# Altium PCB FPGA_Board.PcbDoc (part 7 of 10)
Units mm, origin at the board's own origin, x right, y up, seen from the top; angles counter-clockwise.
Board outline 103.63 x 86.08 mm, 2 copper layers (Top Layer, Bottom Layer); 109 components, 200 nets, 667 pads, 237 vias.
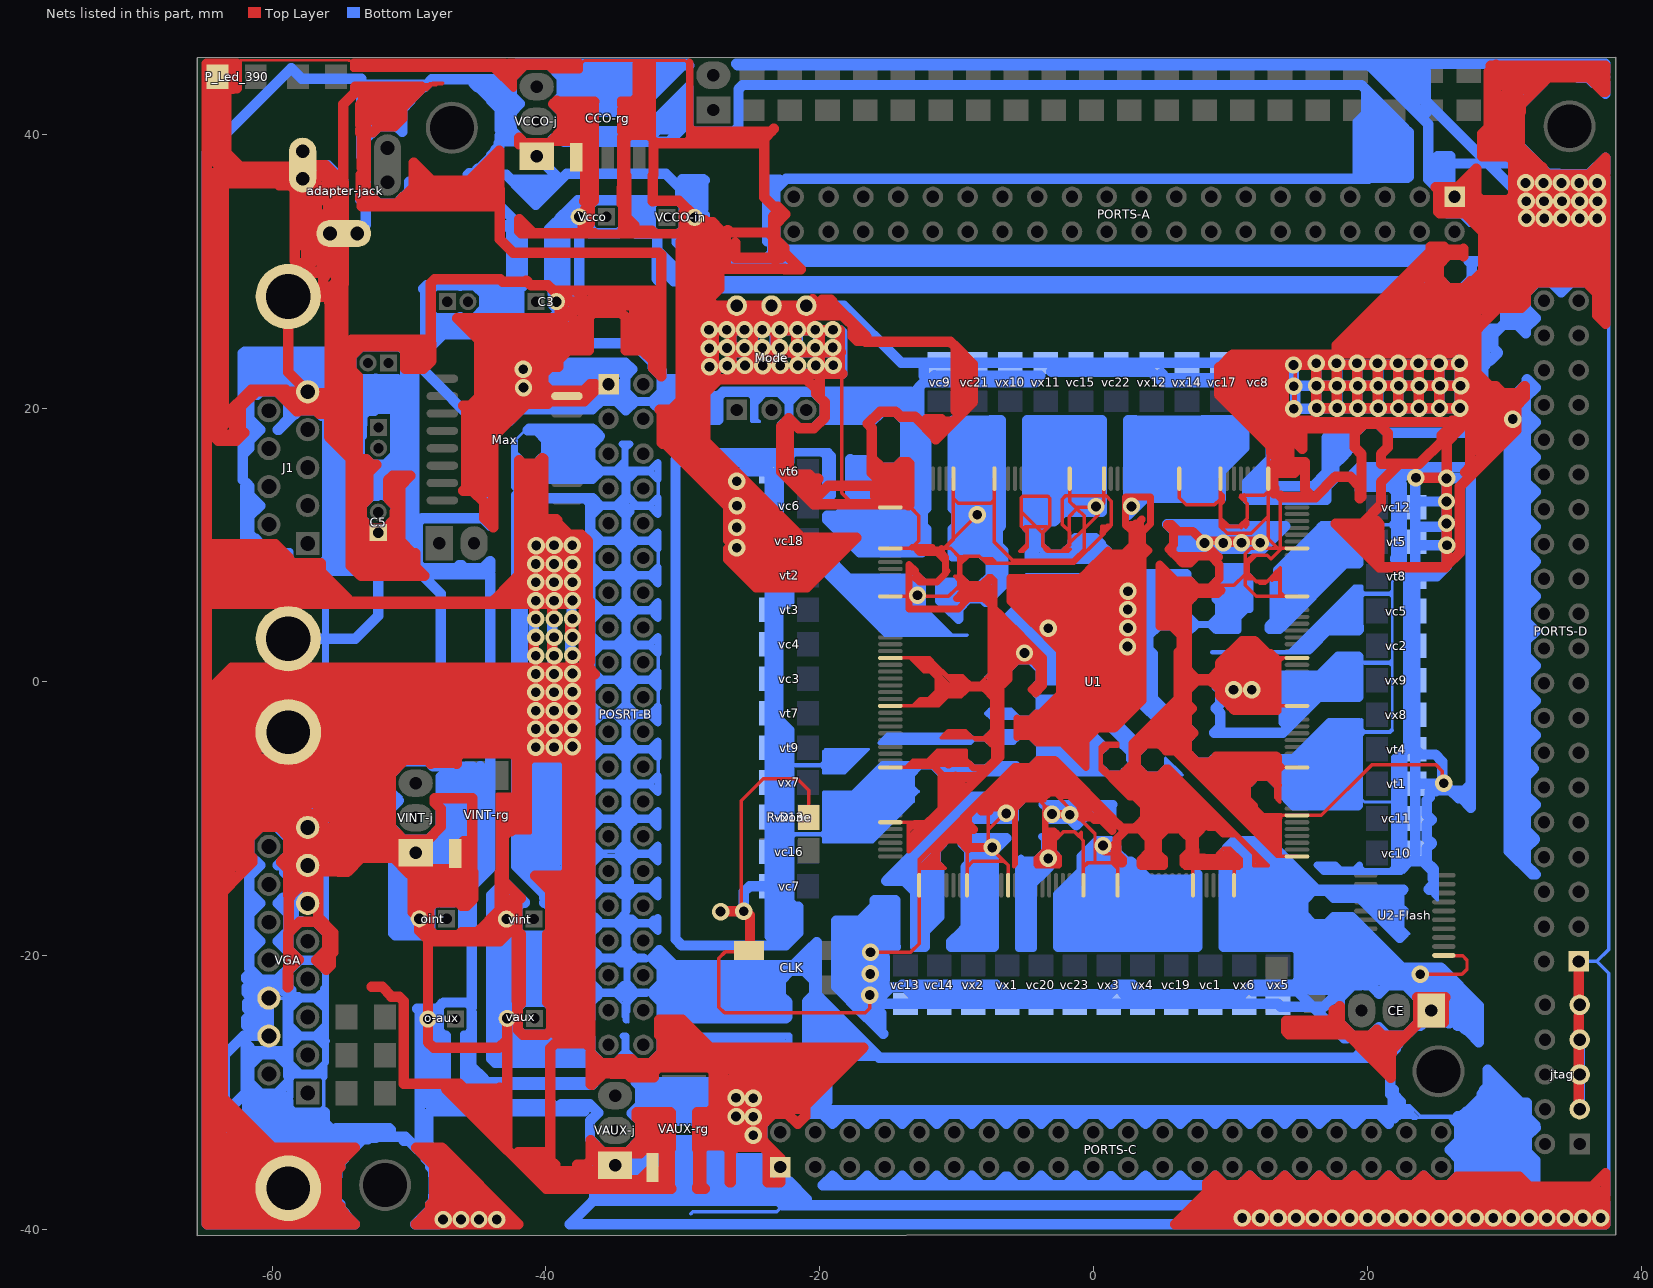
[diagram p7: the nets of this part, all layers, seen from the top]

## Via types
v1: diameter 1.27, hole 0.711, Top Layer to Bottom Layer, 237 vias

## Nets (pads, with @x,y where several pads share a name; then routed paths per layer and width w, separated by ;. In a path a pad name is that pad's centre, name@x,y a point inside that pad or via, vN(x,y) a via of type N, cw(c..) or ccw(c..) an arc to the next point about the centre after c; other vN are vias at no path point) (continued)
GND: (continued)
  Bottom Layer w0.762: -61.532,13.534 -60.878,12.88 -61.671,12.087 ; -59.486,9.399 -59.773,9.399 -60.23,9.399 -60.48,9.649 -60.871,10.04 -61.159,10.328 -61.659,10.828 ; -59.183,-15.747 -59.606,-16.17 -58.839,-16.937 -58.813,-16.963 -58.813,-18.147 -58.839,-18.173 -58.869,-18.203 -58.869,-18.742 ; -58.925,-29.34 -59.634,-30.048 ; -58.831,-26.95 -58.863,-26.982 ; -58.831,-21.53 -58.831,-22.302 -58.606,-22.527 -58.606,-22.608 -58.839,-22.841 -58.863,-22.865 -58.863,-22.913 -58.863,-26.982 ; -58.831,-18.742 -58.839,-18.742 -58.869,-18.742 ; VGA.16@-58.822,-36.985 -58.932,-36.875 -62.125,-36.875 -63.459,-35.541 -63.459,-31.536 ; VGA.17@-58.822,-3.665 -58.822,-6.265 ; J1.10@-58.822,3.155 -56.1,3.155 -53.914,3.155 -52.25,4.819 -52.25,8.115 ; -58.813,-28.756 -58.813,-28.408 -58.813,-28.043 -58.831,-28.025 -59.65,-27.206 -60.834,-27.206 -61.671,-28.043 ; adapter-jack.2@-57.775,37.75 -55.941,37.75 -54.791,36.6 -54.791,32.766 adapter-jack.3@-54.775,32.75 ; VGA.6@-57.402,-16.17 VGA.7@-57.402,-13.4 VGA.8@-57.402,-10.63 -57.402,-9.316 -57.442,-9.276 ; -56.389,19.429 -56.81,19.849 -57.994,19.849 -58.297,19.546 -58.395,19.546 -59.521,18.42 -59.606,18.42 -58.813,19.213 -58.813,20.397 ; -56.135,8.86 -55.973,9.023 -55.973,9.175 -55.895,9.253 ; adapter-jack.3B@-53.775,32.75 -53.152,33.373 -53.152,34.845 ; -52.533,19.784 -53.092,19.784 -53.434,19.442 -53.434,18.827 -53.464,18.797 -53.464,17.994 -53.615,17.843 -53.615,16.219 ; -52.338,13.609 -52.751,13.609 -53.459,12.901 -53.459,11.899 -53.45,11.89 ; -51.216,13.076 -51.537,13.397 -51.537,13.611 -51.644,13.504 -51.794,13.654 -53.161,13.654 -53.161,14.227 -53.063,14.325 -51.483,14.325 -51.483,14.812 -51.624,14.953 -53.063,14.953 -53.063,15.506 -52.967,15.602 -51.001,15.602 ; -50.383,-33.501 -50,-33.501 ; -49.991,36.543 -49.918,36.47 ; -48.456,-35.427 -48.186,-35.698 ; v1(-47.514,-39.267) -47.861,-39.614 -48.424,-39.614 ; v1(-46.204,-39.267) v1(-44.893,-39.267) ; -44.494,25.949 -44.494,26.242 ; -44.493,25.948 -44.41,26.031 -42.48,26.031 -42.48,27.69 -42.657,27.867 -43.869,27.867 -43.987,27.749 -43.987,26.749 ; -43.906,24.547 -43.906,24.673 -43.172,25.407 ; -43.392,40.327 -43.392,43.124 ; -42.134,45.139 -41.08,45.139 ; v1@-41.608,21.768 -41.59,21.75 v1@-41.176,21.75 ; v1@-41.591,23.083 -41.176,22.668 -41.176,22.353 v1@-41.176,21.75 ; v1@-41.175,22.917 -40.758,22.5 -34.884,22.5 -34.517,22.867 -34.766,23.116 -40.476,23.116 -41.075,23.715 -42.057,22.733 -42.057,20.17 -41.176,21.051 ; v1@-40.916,-4.929 -40.916,-3.543 v1@-40.8,-3.427 ; v1@-40.898,4.508 -40.898,3.211 v1@-40.889,3.202 ; v1@-40.862,7.164 -40.862,5.859 v1@-40.844,5.841 ; v1@-40.859,8.609 v1(-40.745,8.609) ; v1@-40.853,1.833 -40.853,0.51 v1@-40.835,0.492 ; v1@-40.827,-4.777 -40.774,-4.724 v1@-39.417,-4.724 ; v1@-40.792,-0.822 -40.751,-0.781 v1@-39.459,-0.781 ; v1@-40.745,-2.134 -40.715,-2.104 v1(-39.407,-2.103) ; VCCO-j.1@-40.678,38.4 -39.044,36.766 -38.831,36.766 ; -40.132,-16.116 -40.021,-16.116 -39.679,-16.458 -39.679,-18.192 -39.806,-18.319 -39.829,-18.342 -39.806,-18.365 -39.573,-18.598 ; v1@-39.544,3.221 v1@-39.544,4.552 ; v1@-39.528,1.874 -39.501,1.847 v1@-39.501,0.54 ; C3.2@-39.526,27.575 -38.988,27.037 -38.988,25.849 -38.912,25.925 -38.912,26.501 -38.758,26.655 -38.758,27.172 -38.528,26.942 -38.528,25.466 -38.72,25.274 -38.969,25.523 -39.161,25.523 -39.621,25.983 -39.372,26.232 -39.372,26.75 -39.556,26.566 -40.274,26.566 -40.274,25.925 -39.085,24.736 -33.604,24.736 -33.066,24.198 ; C3.2@-39.526,27.907 -38.748,28.685 -38.748,33.324 -38.965,33.542 -39.021,33.542 ; v1@-39.512,7.167 -39.496,7.151 v1@-39.496,5.836 ; v1@-39.512,8.609 v1(-40.745,8.609) ; v1@-39.456,-4.781 -39.417,-4.742 v1@-39.417,-4.724 ; v1@-39.417,-3.433 v1@-39.417,-4.724 ; v1(-39.408,9.976) v1(-38.085,9.976) ; C3.2@-39.235,27.775 C3.2@-39.197,27.775 ; v1@-38.223,3.195 -38.223,1.902 v1@-38.199,1.878 ; v1@-38.215,4.537 -38.134,4.618 v1@-38.134,5.846 ; v1@-38.199,8.603 -38.199,7.212 v1@-38.15,7.163 ; v1@-38.174,0.544 -38.174,-0.757 v1@-38.158,-0.773 ; v1@-38.109,-2.082 -38.109,-3.381 v1@-38.081,-3.409 ; v1(-38.063,-4.724) v1@-39.417,-4.724 ; Vcco.2@-37.575,33.975 -37.575,28.289 -38.089,27.775 C3.2@-39.197,27.775 ; -37.465,18.003 -37.534,18.072 ; -36.498,15.852 -36.883,15.467 -39.053,15.467 -39.175,15.589 -39.588,15.589 -39.87,15.871 -39.87,15.918 -37.427,15.918 -37.127,16.218 -36.763,16.218 ; -36.45,-12.135 -36.763,-11.823 -36.763,-10.717 -36.349,-10.303 -36.349,-9.908 -36.349,-9.697 -36.763,-9.283 -36.763,-8.177 -36.046,-7.46 -36.763,-6.743 -36.763,-5.637 -36.658,-5.532 -36.046,-4.92 -36.059,-4.907 -36.636,-4.33 -36.763,-4.203 -36.763,-3.097 -36.046,-2.38 -36.763,-1.663 -36.763,-0.557 -36.046,0.16 ; -36.095,15.449 -36.497,15.852 -36.763,16.117 -36.763,16.218 ; -36.046,-15.08 -36.047,-15.078 -36.763,-14.363 -36.763,-13.257 -36.048,-12.543 -36.048,-12.537 ; -36.046,-12.54 -36.048,-12.537 ; -36.046,15.4 -36.61,14.836 -39.701,14.836 -40.484,15.619 -40.484,16.137 -39.976,16.645 -39.976,17.655 -40.69,18.369 ; -35.942,35.184 -36.442,35.184 ; VAUX-j.1@-34.95,-35.3 -36.469,-33.781 -36.469,-37.804 -36.571,-37.906 -36.551,-37.906 ; VAUX-j.1@-33.794,-35.413 -25.095,-35.413 -25.08,-35.398 ; -33.714,-17.528 -33.714,-17.411 ; -32.859,-36.506 -32.745,-36.392 -24.686,-36.392 ; -32.272,20.48 -32.206,20.547 -32.09,20.662 -31.664,21.088 ; -30.8,44.671 -31.576,43.895 -32.02,43.895 ; -29.223,25.697 -29.192,25.666 -29.192,24.065 ; v1@-28.041,23.029 -28.706,23.029 -29.255,22.48 -27.813,22.48 -27.203,23.09 v1@-26.784,23.09 ; v1@-27.924,25.697 -27.924,24.159 -27.877,24.112 -27.595,24.394 v1@-26.811,24.394 ; -26.507,-29.638 -26.507,-29.864 -26.979,-30.336 ; v1@-26.35,-29.874 -26.354,-29.878 v1@-26.354,-32.005 ; v1@-26.167,-30.38 -26.135,-30.412 v1@-25.395,-30.412 ; v1@-26.166,-30.443 -26.113,-30.496 v1(-26.113,-31.743) ; v1(-26.075,14.65) -26.075,14.925 -25.625,15.375 vt6.1@-23.65,15.375 vc6.2@-23.65,12.85 ; Mode.6@-26.065,27.485 -26.065,26.085 v1@-26.475,25.675 ; v1(-25.546,-16.749) -25.546,-15.334 -25.132,-14.92 vc7.2@-23.65,-14.92 ; v1@-25.501,24.394 -26.168,24.394 v1@-26.475,24.088 ; v1@-24.95,-33.082 v1@-24.858,-32.99 ; v1(-24.858,-33.109) v1@-24.858,-32.013 ; v1@-24.858,-31.852 v1@-24.858,-32.013 ; v1@-24.816,-31.82 v1@-24.858,-31.82 ; v1@-24.197,23.097 -24.258,23.097 -24.855,22.5 ; Mode.5@-23.525,27.485 -23.525,25.905 v1@-23.295,25.675 ; -23.42,-22.548 -23.28,-22.408 ; PORTS-C.1@-23.371,-35.548 -23.842,-35.548 -24.386,-36.092 ; -23.214,-16.939 -23.036,-16.761 vt7.1@-23.036,-2.72 ; v1@-22.893,23.09 -22.893,22.842 -23.235,22.5 ; -22.405,-19.159 -21.561,-18.315 -21.561,-16.404 -21.892,-16.404 ; -22.295,-18.413 -21.892,-18.01 -21.892,-16.404 ; -22.234,16.517 -22.234,16.086 -22.743,16.086 -22.818,16.161 -30.123,16.161 -30.202,16.082 -22.913,16.082 -22.643,15.812 -23.011,15.445 -23.011,8.03 -22.345,7.364 -22.234,7.364 -22.234,5.861 -22.37,5.861 -22.775,5.455 ; -22.062,16.689 -30.08,16.689 -30.539,16.23 -30.539,-18.784 -30.071,-19.252 -22.498,-19.252 -22.498,-16.435 ; v1@-21.603,23.097 -21.603,22.512 v1@-21.615,22.5 ; -20.937,-23.349 -20.418,-22.83 -20.418,-21.82 -20.777,-21.461 ; v1@-20.286,23.123 -20.286,22.791 -20.115,22.62 v1@-20.115,24.088 ; v1(-19.052,24.422) -19.052,24.291 -18.946,24.185 -18.548,24.185 -18.45,24.088 v1@-20.115,24.088 ; -18.789,-25.499 -19.349,-24.939 -19.456,-24.939 ; -17.314,-8.463 -17.522,-8.671 -19.041,-8.671 -19.041,-10.989 -19.29,-11.238 -19.098,-11.43 -17.759,-11.43 -16.432,-11.43 -16.432,-11.259 -16.872,-10.819 -16.93,-10.877 -17.206,-10.877 -18.516,-10.877 -18.516,-9.281 -18.521,-9.276 -17.583,-9.276 -17.492,-9.185 -17.492,-9.471 -17.938,-9.917 -17.938,-10.219 -17.874,-10.283 -17.243,-10.283 -17.243,-9.223 -17.11,-9.09 -17.11,-9.934 -16.687,-10.357 -16.554,-10.49 -16.145,-10.899 -16.145,-10.988 -13.444,-8.287 -13.444,-8.267 -13.441,-8.264 -13.441,-7.976 -13.557,-7.86 -13.945,-7.86 -16.119,-10.034 -16.241,-9.912 -16.485,-9.668 -16.485,-8.952 -16.787,-8.65 -16.787,-8.395 -16.029,-9.153 -16.029,-9.223 -14.225,-7.419 -13.748,-7.419 -13.584,-7.419 -13.456,-7.291 -13.456,-7.127 -13.456,-6.921 -14.448,-6.921 -15.8,-8.273 -16.092,-8.273 -16.341,-8.024 -15.906,-7.589 -15.848,-7.589 -15.058,-6.799 -15.058,-6.666 -14.793,-6.401 -13.366,-6.401 ; v1(-16.3,-19.75) -16.325,-19.775 v1(-16.325,-21.325) v1@-16.325,-21.955 ; v1@-15.753,-20.053 -15.293,-20.053 -15.255,-20.091 -15.255,-22.315 ; -15.657,-19.881 v1@-15.791,-20.015 ; -15.504,-22.929 -15.791,-22.642 -15.791,-22.489 ; -15.373,-25.697 -15.523,-25.546 ; -12.482,-15.293 -13.467,-14.308 -13.582,-14.308 ; -12.481,-15.293 -12.481,-17.052 ; -10.653,6.338 -10.653,6.594 -10.691,6.632 -10.672,6.651 -10.102,6.651 -10.073,6.68 -9.722,6.68 -9.579,6.537 ; -10.063,-19.336 -10.385,-19.336 -10.385,-18.975 -10.316,-18.906 ; -9.937,-19.336 -9.886,-19.336 ; v1(-8.494,12.208) -8.494,9.693 -8.245,9.444 ; v1(-7.414,-12.088) v1@-7.414,-12.449 ; v1(-6.387,-9.607) -9.763,-9.607 -10.145,-9.989 ; v1@-6.162,-9.143 -6.331,-8.974 -9.586,-8.974 ; -6.16,1.908 -6.117,1.908 -5.587,2.438 -5.587,2.541 ; -3.397,-1.793 -3.317,-1.873 -0.541,-1.873 -0.157,-1.873 -0.157,-2.257 -0.157,-2.286 -0.029,-2.414 -4.138,-2.414 -4.151,-2.401 -3.856,-2.105 -3.856,-1.793 -3.856,-1.331 -3.821,-1.296 -1.118,-1.296 -0.086,-1.296 0.851,-2.233 0.596,-2.233 0.501,-2.138 0.501,-2.52 1.053,-3.072 ; -3.382,0.234 -3.881,0.733 ; v1(-3.32,3.911) v1@-3.539,3.911 ; vx11.1@-3.099,22.661 4.22,22.661 4.997,21.884 12.984,21.884 13.135,22.035 13.135,22.19 ; -1.869,18.149 -1.869,17.901 ; v1(0.174,12.808) -1.807,12.808 -1.88,12.735 ; v1(0.68,-11.954) v1@0.68,-12.071 ; v1@1.226,-11.641 0.274,-11.641 -0.131,-12.046 ; 1.456,-11.87 1.456,-11.969 1.354,-12.071 ; 1.986,-4.005 1.053,-3.072 ; v1@2.256,4.715 v1@2.473,4.932 ; v1(2.489,5.289) 2.51,5.31 v1(2.51,6.629) ; v1(2.504,3.934) 2.504,2.611 v1(2.473,2.58) ; 2.993,-5.023 2.378,-4.408 2.378,-4.328 2.898,-4.328 1.084,-2.514 1.053,-2.514 1.053,-3.072 ; vx12.1@4.975,22.535 5.32,22.19 13.135,22.19 ; v1@7.858,9.736 7.334,9.736 ; 8.451,14.822 8.732,14.822 9.285,15.375 ; 8.908,-39.224 8.939,-39.193 10.209,-39.193 ; 9.051,-5.64 8.784,-5.64 8.53,-5.894 7.52,-5.894 ; 9.285,13.44 9.285,13.988 9.285,15.375 ; 9.422,-5.64 8.555,-6.507 8.386,-6.507 8.706,-6.827 ; v1(10.801,10.17) 7.768,10.17 7.334,9.736 ; 11.529,-39.193 12.83,-39.193 ; v1(11.55,-0.581) 11.31,-0.341 9.212,-0.341 ; 11.912,9.519 11.949,9.519 12.129,9.519 13.001,10.391 ; 12.021,-12.302 13.803,-14.084 13.803,-14.445 ; 13.135,22.394 13.135,22.19 ; 14.113,-39.15 14.119,-39.156 v1@15.408,-39.156 ; 14.23,-5.64 14.625,-5.64 ; 14.878,8.896 14.136,8.154 13.529,8.154 ; 15.497,-19.496 15.497,-18.939 15.867,-18.569 17.621,-18.569 17.87,-18.32 18.548,-18.32 21.122,-20.894 21.451,-20.565 21.451,-20.491 21.297,-20.491 18.542,-17.736 17.715,-17.736 17.319,-18.132 15.243,-18.132 ; v1(16.25,23.275) v1@16.25,23.15 ; v1@16.685,-39.236 16.808,-39.359 v1@17.955,-39.359 ; 16.932,-7.07 15.502,-5.64 14.625,-5.64 ; v1(17.746,23.275) 17.793,23.229 v1@17.793,23.15 ; 18.134,4.309 17.59,3.765 ; 18.503,16.759 18.182,16.438 ; 19.062,6.126 19.062,5.719 18.8,5.457 ; v1@19.146,-39.022 19.154,-39.03 v1@20.548,-39.03 ; v1(19.243,23.275) v1@19.243,23.15 ; 19.379,-3.605 19.316,-3.542 19.316,-3.015 17.25,-3.015 16.66,-3.605 14.625,-5.64 ; 19.429,-3.656 19.436,-3.663 19.291,-3.808 19.291,-8.278 19.291,-9.01 14.625,-9.01 13.545,-7.93 13.545,-7.57 12.831,-6.856 ; 19.826,-22.166 20.226,-22.166 20.668,-22.607 ; 20.482,-26.517 20.822,-26.857 ; v1(20.739,23.275) 20.779,23.236 v1@20.779,23.15 ; 21.541,-21.016 21.681,-20.876 22.546,-20.876 ; 21.801,-31.72 21.568,-31.953 21.568,-32.278 20.851,-31.561 ; 21.937,-29.782 21.937,-30.166 22.433,-30.662 22.433,-30.719 22.237,-30.915 21.862,-31.29 ; 21.968,-31.878 21.93,-31.84 21.651,-31.561 20.851,-31.561 ; v1(22.236,23.275) v1@22.236,23.15 ; 22.638,-18.388 22.353,-18.673 ; v1@23.226,-38.969 21.906,-38.969 21.876,-38.999 22.226,-39.349 v1@25.329,-39.349 ; vc10.2@23.5,-12.5 vc11.2@23.5,-9.975 vt1.1@23.5,-7.45 ; v1(23.732,23.275) 23.764,23.243 v1@23.764,23.15 ; CE.1@23.864,-25.132 23.48,-25.132 22.35,-26.262 21.104,-26.262 ; CE.1@23.954,-25.041 24.135,-24.861 25.852,-24.861 25.92,-24.929 25.977,-24.929 25.894,-24.846 25.894,-24.518 25.906,-24.506 25.906,-23.577 26.537,-24.208 26.537,-25.081 26.588,-25.132 26.874,-25.132 27.16,-25.418 27.16,-24.296 25.453,-22.589 25.204,-22.589 24.704,-22.089 24.704,-21.351 24.763,-21.41 25.299,-21.41 25.299,-21.636 27.454,-23.791 27.454,-25.615 28.142,-26.303 28.142,-23.648 25.371,-20.876 22.546,-20.876 ; 24.462,-15.138 24.513,-15.188 ; v1@24.548,-38.969 25.845,-38.969 25.871,-38.943 ; CE.1@24.65,-24 24.65,-22.327 ; 24.769,-14.83 24.513,-15.087 24.513,-15.188 ; 24.769,-14.393 24.769,-13.82 ; v1(25.229,23.275) v1@25.229,23.15 ; v1(25.564,-7.4) 26.095,-7.931 ; v1(26.8,21.638) v1@26.725,21.638 ; 27.22,-38.917 27.242,-38.895 28.54,-38.895 ; 27.434,15.461 27.23,15.664 23.539,15.664 22.991,15.664 22.616,15.289 ; 27.556,-35.214 27.556,-35.144 ; 28.949,23.455 29.535,24.041 29.206,24.37 29.206,25.38 29.619,25.793 ; 29.887,-38.839 29.943,-38.783 34.424,-38.783 v1@36.731,-38.783 ; v1(30.609,19.197) v1@30.333,18.92 ; v1@30.919,18.836 30.919,-12.59 31.208,-12.879 31.545,-12.542 31.545,19.509 31.063,19.991 31.063,19.278 30.333,18.548 ; v1(31.55,36.446) 31.579,36.417 v1@31.579,35.112 ; v1(31.615,33.855) 29.47,33.855 28.912,33.855 ; 31.853,38.417 31.3,37.864 28.827,37.864 ; v1@32.889,36.38 32.914,36.405 v1@34.183,36.405 ; v1@32.919,33.855 v1(34.202,33.855) v1@34.232,33.855 ; v1@32.919,35.091 34.212,35.091 v1@34.216,35.095 ; v1@34.565,-39.323 36.191,-39.323 v1@36.731,-38.783 ; 35.327,29.179 35.116,29.179 ; v1@35.48,36.432 v1@36.784,36.432 ; jtag.3@35.5,-31.21 jtag.5@35.5,-28.67 jtag.7@35.5,-26.13 ; v1@35.506,35.099 36.796,35.099 v1(36.809,35.112) ; v1@35.6,33.816 35.59,33.816 35.608,33.798 v1@36.789,33.798 ; v1(37.042,-39.158) 37.042,-39.269 37.132,-39.359 v1@37.133,-38.783 ; 37.387,44.183 37.137,43.933 36.408,43.933 ; -63.459,-31.536 -61.921,-29.998 -61.921,-26.982 ; -63.459,-31.536 -63.459,-27.247 -62.062,-25.85 -60.257,-25.85 VGA.10@-60.242,-25.865 VGA.10@-60.242,-25.82 ; -62.136,16.595 -62.136,17.344 ; -62.136,16.595 -62.136,14.771 -61.796,14.431 ; -62.136,16.595 -61.671,17.06 -61.671,17.627 ; -62.136,17.344 -62.136,24.002 -62.01,24.128 -53.882,24.128 ; -62.136,17.344 -61.954,17.344 -61.671,17.627 ; -61.957,11.801 -61.671,12.087 ; -61.957,11.801 -61.957,14.27 -61.796,14.431 ; -61.957,11.801 -61.957,8.209 -61.863,8.115 -57.744,8.115 -52.25,8.115 ; -61.921,-26.982 -61.671,-26.982 ; -61.921,-26.982 -61.921,-26.399 -61.671,-26.649 -61.671,-26.982 ; -61.796,14.431 -61.671,14.306 -61.671,12.087 ; -61.671,-29.227 -60.834,-30.064 ; -61.671,-29.227 -61.671,-29.511 -61.387,-29.795 -61.387,-29.964 -61.287,-30.064 -60.834,-30.064 ; -61.671,-29.227 -61.671,-28.043 ; -61.671,-28.043 -61.671,-26.982 ; -61.671,-26.982 -58.863,-26.982 ; -61.671,-19.733 -61.671,-18.147 ; -61.671,-19.733 -60.878,-18.94 -61.671,-18.147 ; -61.671,-19.733 -61.671,-20.917 -61.466,-21.123 ; -61.671,-18.147 -61.671,-16.963 ; -61.671,-16.963 -61.671,-15.377 ; -61.671,-16.963 -60.878,-16.17 -61.671,-15.377 ; -61.671,-15.377 -61.671,-14.193 ; -61.671,-14.193 -61.671,-12.607 ; -61.671,-14.193 -60.878,-13.4 -61.671,-12.607 ; -61.671,-12.607 -61.671,-11.423 ; -61.671,-11.423 -61.671,-6.345 -61.751,-6.265 -59.587,-6.265 -59.321,-6.531 -59.321,-8.144 -57.943,-9.522 -57.943,-15.288 -58.622,-15.967 -58.819,-15.967 -58.819,-15.383 -58.813,-15.377 -58.813,-14.835 -58.593,-14.835 -58.543,-14.885 -58.474,-14.816 -58.474,-14.265 -58.572,-14.363 -58.813,-14.363 -58.813,-14.193 -59.114,-13.891 -58.956,-13.733 -58.651,-13.733 -58.651,-13.203 -58.691,-13.163 -59.281,-13.163 -59.518,-13.4 -59.606,-13.4 -58.788,-12.582 -58.396,-12.582 -58.396,-9.886 -59.508,-8.774 -59.547,-8.774 -59.832,-8.489 -59.832,-6.934 -59.95,-6.816 -60.993,-6.816 -60.993,-10.054 -61.229,-10.29 -60.933,-10.586 -60.834,-10.586 ; -61.671,-11.423 -60.834,-10.586 ; -61.671,10.903 -61.671,10.84 -61.659,10.828 ; -61.671,10.903 -61.659,10.891 -61.659,10.828 ; -61.671,10.903 -61.671,12.087 ; -61.671,17.627 -61.671,19.213 ; -61.671,17.627 -60.878,18.42 -61.671,19.213 ; -61.671,19.213 -61.671,21.291 -61.619,21.343 ; -61.659,10.828 -61.659,8.787 -58.595,8.787 -58.489,8.681 -58.309,8.681 -52.403,8.681 -52.25,8.834 ; -61.619,21.343 -61.402,21.56 -59.001,21.56 ; -61.619,21.343 -61.619,20.969 -61.099,20.969 -60.834,21.234 -59.65,21.234 -58.813,20.397 ; -61.466,-21.123 -60.954,-21.634 ; -61.466,-21.123 -61.889,-21.546 -61.889,-21.674 -61.781,-21.566 -61.721,-21.566 -61.653,-21.634 -60.954,-21.634 ; -60.954,-21.634 -60.834,-21.754 -59.65,-21.754 -59.376,-21.48 ; -60.856,-22.481 -60.314,-21.939 -59.852,-21.939 -59.232,-22.559 -59.045,-22.372 -59.045,-21.939 -59.376,-21.608 -59.376,-21.48 ; -60.856,-22.481 -61.033,-22.304 -61.859,-22.304 -61.859,-22.717 -61.731,-22.845 -61.731,-22.766 -61.446,-22.481 -61.328,-22.481 -61.092,-22.717 -61.298,-22.923 -61.298,-23.435 -61.318,-23.415 -61.81,-23.415 -61.81,-23.858 -61.721,-23.947 -61.032,-23.947 -60.796,-24.183 -60.806,-24.193 -60.806,-24.645 -61.633,-24.645 -61.79,-24.488 -61.889,-24.587 -61.889,-25.118 -61.22,-25.118 -61.082,-24.98 VGA.10@-60.242,-25.82 ; -60.856,-22.481 VGA.11@-60.242,-23.095 VGA.10@-60.242,-25.82 ; -60.834,-30.064 -59.65,-30.064 ; -60.834,-10.586 -59.65,-10.586 -59.289,-10.947 ; -59.65,-30.064 -59.634,-30.048 ; -59.65,-30.064 -59.41,-30.064 -59.394,-30.048 ; -59.634,-30.048 -59.394,-30.048 ; -59.394,-30.048 -58.831,-30.611 -58.831,-31.107 -58.489,-31.449 -56.163,-31.449 -56.138,-31.424 -56.138,-32.238 -55.553,-32.822 ; -59.376,-21.48 -58.839,-20.943 -58.813,-20.917 -58.813,-19.733 -58.839,-19.707 -59.606,-18.94 -59.093,-18.427 -59.025,-18.427 -59.025,-18.86 -59.006,-18.879 -58.869,-18.742 ; -59.301,-9.935 -58.957,-9.935 -58.72,-10.172 -58.72,-11.899 -58.813,-11.992 -58.813,-11.423 -59.289,-10.947 ; -59.301,-9.935 -60.295,-9.935 -60.403,-9.827 -60.373,-9.797 -60.373,-8.844 -59.98,-9.237 -59.694,-9.237 -59.301,-9.63 -59.301,-9.935 ; -59.301,-9.935 -59.301,-10.201 -58.848,-10.654 -59.141,-10.947 -59.289,-10.947 ; -59.213,-31.93 -58.435,-31.93 ; -59.213,-31.93 -61.029,-31.93 -61.043,-31.944 -60.841,-32.146 -58.997,-32.146 ; -59.213,-31.93 -59.962,-31.181 -60.163,-31.382 -61.374,-31.382 -61.374,-32.65 -61.244,-32.78 -56.202,-32.78 -56.202,-32.751 ; -59.213,-31.93 -58.997,-32.146 ; -59.001,21.56 -59.001,21.319 -58.36,20.678 J1.5@-57.855,20.678 ; -59.001,21.56 J1.5@-57.831,21.56 ; -58.997,-32.146 -58.868,-32.275 -58.796,-32.275 -58.925,-32.146 -58.997,-32.146 ; -58.822,-6.265 -56.428,-6.265 -56.349,-6.344 -56.349,-7.111 -56.379,-7.141 -56.664,-7.141 ; -58.822,-6.265 -58.822,-7.896 -57.442,-9.276 ; -58.813,20.397 -58.376,19.96 -54.714,19.96 ; -58.435,-31.93 -59.727,-30.638 -61.668,-30.638 -61.837,-30.807 -61.837,-33.052 -61.416,-33.473 -54.903,-33.473 -55.553,-32.822 ; -58.435,-31.93 -58.363,-32.002 -56.951,-32.002 ; -58.435,-31.93 -57.023,-31.93 -56.951,-32.002 ; J1.5@-57.855,20.678 -58.284,21.107 J1.5@-57.831,21.56 ; J1.5@-57.855,20.678 -56.719,20.678 -56.482,20.441 ; J1.5@-57.855,20.678 -57.618,20.441 -56.482,20.441 ; J1.5@-57.831,21.56 -57.743,21.648 -56.673,21.648 -56.673,21.35 -56.513,21.19 ; J1.5@-57.831,21.56 -57.772,21.56 J1.5@-57.402,21.19 -56.513,21.19 ; -57.442,-9.276 -56.822,-9.276 ; -56.951,-32.002 -56.202,-32.751 ; -56.951,-32.002 -56.605,-32.002 -56.202,-32.405 -56.202,-32.751 ; -56.822,-9.276 -56.93,-9.168 -56.93,-9.148 -57.323,-8.755 -56.31,-8.755 -56.31,-8.311 -56.614,-8.007 ; -56.822,-9.276 -56.743,-9.355 -56.822,-9.276 ; -56.664,-7.141 -56.959,-6.846 -57.067,-6.954 -58.268,-6.954 -58.081,-7.141 -56.664,-7.141 ; -56.664,-7.141 -56.388,-7.417 -56.388,-8.007 -56.614,-8.007 ; -56.614,-8.007 -56.968,-7.653 -58.268,-7.653 -57.914,-8.007 -56.614,-8.007 ; -56.513,21.19 -56.036,20.713 -56.148,20.713 -56.022,20.587 -56.022,20.441 ; -56.513,21.19 -56.433,21.19 ; -56.482,20.441 -56.022,20.441 ; -56.482,20.441 -56.426,20.385 -56.068,20.385 -56.022,20.431 -56.022,20.441 ; -56.433,21.19 -55.532,22.091 ; -56.433,21.19 -55.904,21.19 -55.155,20.441 ; -56.202,-32.751 -55.842,-33.111 -55.553,-32.822 ; -56.022,20.441 -55.155,20.441 ; -55.973,10.098 -55.973,19.216 -56.251,19.494 -55.463,19.494 -55.365,19.396 -55.365,10.688 -55.227,10.55 -54.814,10.55 -54.432,10.932 ; -55.973,10.098 -55.973,9.33 -55.895,9.253 ; -55.973,10.098 -52.826,10.098 -53.328,9.596 -55.454,9.596 -55.503,9.645 -55.895,9.253 ; -55.895,9.253 -55.806,9.163 -53.25,9.163 -52.699,9.714 -52.25,9.714 ; -55.553,-32.822 -55.323,-32.592 -51.434,-32.592 -51.333,-32.693 -51.333,-33.23 ; -55.532,22.091 -61.534,22.091 -61.72,21.905 -61.72,23.403 -61.561,23.562 -54.935,23.562 -54.892,23.605 -54.834,23.547 -54.834,22.669 -55.194,22.669 ; -55.532,22.091 -53.718,22.091 ; -55.532,22.091 -55.194,22.429 -55.194,22.669 ; -55.305,-37.88 -55.034,-38.151 -55.034,-38.438 -54.705,-38.767 -54.705,-38.863 ; -55.305,-37.88 -55.305,-38.263 -54.705,-38.863 ; -55.305,-37.88 -55.305,-36.163 ; -55.305,-36.163 -55.305,-35.315 -55.034,-35.044 ; -55.305,-36.163 -55.236,-36.095 -55.236,-35.629 -55.034,-35.427 -55.034,-35.044 ; -55.194,22.669 -61.316,22.669 -61.561,22.424 -61.561,22.972 -61.446,23.087 -55.222,23.087 -55.194,23.115 -55.194,22.669 ; -55.155,20.441 -52.528,20.441 ; -55.155,20.441 -54.714,20 -54.714,19.96 ; -55.034,-35.044 -54.378,-34.388 ; -54.714,19.96 -53.009,19.96 ; -54.714,19.96 -54.714,11.214 -54.432,10.932 ; -54.705,-38.863 -54.705,-39.349 -54.719,-39.363 -54.205,-39.363 ; -54.705,-38.863 -54.205,-39.363 ; -54.432,10.932 -54.15,10.65 -52.5,10.65 C5.1@-52.25,10.9 -52.25,9.714 ; -54.432,10.932 -54.178,11.186 -54.178,11.499 ; -54.378,-34.388 -54.009,-34.019 ; -54.378,-34.388 -54.747,-34.019 -54.009,-34.019 ; -54.205,-39.363 -53.954,-39.614 -64.751,-39.614 -64.771,-39.594 -64.771,38.634 -58.594,44.811 -57.845,44.062 -53.494,44.062 -53.494,38.405 -53.28,38.191 ; -54.178,11.499 -53.854,11.175 -53.01,11.175 -52.934,11.251 -53.219,11.536 -53.219,11.658 -53.45,11.89 ; -54.178,11.499 -54.178,15.401 -54.219,15.442 -54.149,15.512 -54.149,19.249 -53.72,19.249 -53.009,19.96 ; -54.009,-34.019 -53.389,-33.399 ; -53.882,24.128 -54.209,23.801 -54.209,22.582 -53.718,22.091 ; -53.882,24.128 -53.501,24.509 -50.633,24.509 -50.291,24.167 -50.291,24.045 ; -53.718,22.091 -53.545,21.918 -53.372,22.091 ; -53.718,22.091 -53.372,22.091 ; -53.615,16.219 -53.079,16.219 -52.726,15.866 -51.724,15.866 -51.09,16.5 -51.001,16.5 ; -53.615,16.219 -53.615,13.795 -53.67,13.74 -53.67,11.89 -53.45,11.89 ; -53.389,-33.399 -53.006,-33.399 -52.905,-33.298 ; -53.389,-33.399 -54.719,-33.399 -54.55,-33.23 -53.219,-33.23 ; -53.389,-33.399 -53.288,-33.298 ; -53.372,22.091 -52.499,22.091 ; -53.288,-33.298 -52.905,-33.298 ; -53.288,-33.298 -53.219,-33.23 ; -53.28,38.191 -53.28,35.965 -53.159,35.844 ; -53.28,38.191 -53.159,38.312 ; -53.219,-33.23 -52.836,-33.23 ; -53.159,35.844 -53.152,35.837 ; -53.159,35.844 -53.159,38.312 ; -53.159,38.312 -53.159,39.656 ; -53.159,39.656 -53.159,43.41 -53.38,43.631 -48.712,43.631 ; -53.159,39.656 -52.557,40.259 ; -53.152,34.845 -53.195,34.845 -53.565,35.215 -53.565,35.485 -53.152,35.485 ; -53.152,34.845 -51.957,34.845 -52.028,34.916 ; -53.152,34.845 -53.152,35.485 ; -53.152,35.485 -52.8,35.485 ; -53.152,35.485 -53.152,35.837 ; -53.152,35.837 -52.8,35.485 ; -53.009,19.96 -52.528,20.441 ; -53.009,19.96 -51.001,19.96 ; -52.905,-33.298 -52.836,-33.23 ; -52.905,-33.298 -52.439,-33.298 -52.371,-33.23 ; -52.836,-33.23 -52.371,-33.23 ; -52.8,35.485 -52.231,34.916 -52.028,34.916 ; -52.557,40.259 -52.231,40.584 ; -52.557,40.259 -52.557,42.888 -52.469,42.976 -49.463,42.976 ; -52.528,20.441 -52.023,20.946 -52.063,20.986 -54.987,20.986 -54.987,21.194 -55.36,21.567 -55.305,21.622 -54.992,21.622 -54.785,21.415 -51.589,21.415 -51.589,20.537 -51.685,20.441 -52.528,20.441 ; -52.499,22.091 -52.433,22.157 -52.367,22.091 ; -52.499,22.091 -52.367,22.091 ; -52.371,-33.23 -51.333,-33.23 ; -52.367,22.091 -50.876,22.091 -50.876,21.848 -51.001,21.723 -51.001,19.96 ; -52.25,8.115 -51.627,8.115 ; -52.25,8.115 -52.25,8.834 ; -52.25,8.834 -52.25,9.714 ; -52.25,9.714 -51.627,9.714 ; -52.231,40.584 -50.919,40.584 -50.511,40.177 -50.511,41.831 -49.911,42.431 -49.911,42.528 ; -52.231,40.584 -51.719,41.096 ; -52.028,34.916 -50.919,34.916 -50.748,35.087 -49.72,35.087 -49.87,35.237 ; -51.719,41.096 -51.685,41.13 -51.685,41.809 -51.67,41.794 -51.03,41.794 ; -51.719,41.096 -52.041,41.096 -52.056,41.111 -52.056,42.35 -52.084,42.378 -50.061,42.378 ; -51.719,41.096 -51.087,41.096 -51.087,41.737 -51.03,41.794 ; -51.627,8.115 -51.627,9.714 ; -51.627,8.115 -51.585,8.073 -50.021,8.073 -50.291,8.343 -50.291,9.714 ; -51.627,9.714 -51.627,11.284 -51.356,11.555 -51.231,11.43 -51.022,11.43 -51.022,9.714 ; -51.627,9.714 -51.022,9.714 ; -51.346,-10.586 -51.346,-9.274 ; -51.346,-10.586 -51.346,-10.939 -51.169,-11.116 -51.169,-18.352 -51.012,-18.509 -48.124,-18.509 ; -51.346,-10.586 -50.418,-11.514 -48.606,-11.514 -48.284,-11.193 -48.284,-13.611 ; -51.346,-9.274 -50.732,-8.66 -51.346,-8.046 ; -51.346,-9.274 -51.346,-8.046 ; -51.346,-8.046 -51.346,-6.734 -50.418,-5.806 ; -51.333,-33.23 -50.271,-33.23 -50,-33.501 ; -51.03,41.794 -50.645,41.794 -50.061,42.378 ; -51.022,9.714 -51.022,8.823 -50.96,8.761 -50.96,9.714 ; -51.022,9.714 -50.96,9.714 ; -51.001,15.602 -51.001,16.5 ; -51.001,15.602 -51.001,13.89 -50.835,13.724 -50.96,13.599 -50.96,9.714 ; -51.001,16.5 -51.001,19.96 ; -50.96,9.714 -50.291,9.714 ; -50.418,-5.806 -47.678,-3.065 -47.678,6.428 -49.632,8.382 -49.632,23.455 -44.057,17.88 ; -50.418,-5.806 -48.606,-5.806 -48.233,-6.179 -45.351,-6.179 -45.415,-6.243 -45.415,-6.783 ; -50.291,9.714 -50.291,24.045 ; -50.291,24.045 -48.857,24.045 -47.495,25.407 ; -50.061,42.378 -49.911,42.528 ; -50,-33.501 -49.218,-34.282 ; -49.918,36.47 -49.991,36.397 -49.991,35.844 -50.597,35.237 -49.87,35.237 ; -49.918,36.47 -49.293,35.845 ; -49.918,36.47 -49.918,35.285 -49.87,35.237 ; -49.911,42.528 -49.463,42.976 ; -49.87,35.237 -49.293,35.237 ; -49.463,42.976 -49.026,43.413 -48.929,43.413 -48.712,43.631 ; -49.293,35.237 -49.293,35.845 ; -49.293,35.237 -48.987,35.237 -48.794,35.044 -49.136,35.044 -49.293,34.887 -49.293,35.237 ; -49.293,35.845 -48.551,35.103 -43.706,35.103 -41.7,33.097 -41.7,28.886 -42.015,28.886 ; -49.218,-34.282 -49.218,-24.043 -49.403,-23.858 -48.012,-23.858 -47.954,-23.916 -47.954,-25.529 -48.456,-25.529 -48.626,-25.359 -48.626,-30.497 -48.876,-30.747 -46.529,-30.747 -47.33,-29.946 -47.33,-25.834 -47.584,-25.834 ; -49.218,-34.282 -48.785,-34.715 -48.785,-34.812 -48.768,-34.812 -48.618,-34.962 -48.59,-34.934 -48.59,-33.778 ; -48.924,-14.337 -48.695,-14.109 -48.629,-14.109 -48.284,-13.764 -48.284,-13.611 ; -48.924,-14.337 -49.467,-14.881 -49.467,-15.641 -49.271,-15.837 -49.271,-15.615 -48.891,-15.235 -48.891,-14.37 -48.924,-14.337 ; -48.924,-14.337 -49.022,-14.239 -49.912,-14.239 -49.939,-14.266 -49.939,-17.213 -49.9,-17.252 -49.9,-17.042 -49.311,-16.453 -48.957,-16.453 -48.957,-16.178 -48.263,-15.484 -48.263,-13.664 -48.21,-13.611 -48.284,-13.611 ; -48.787,8.291 -48.548,8.291 ; -48.787,8.291 -49.037,8.291 -49.379,8.633 -49.379,11.617 -49.037,11.959 -44.599,11.959 -44.057,11.418 -44.057,17.88 ; -48.787,8.291 -48.787,7.87 -44.08,7.87 -44.057,7.847 -44.057,-13.598 -45.153,-14.694 -45.153,-13.927 -44.667,-13.441 -44.667,-6.297 -44.798,-6.166 -45.415,-6.783 ; -48.712,43.631 -48.33,44.013 -44.988,44.013 ; -48.59,-33.778 -48.186,-34.182 -48.186,-35.698 ; -48.59,-33.778 -48.59,-31.51 -48.449,-31.369 -37.193,-31.369 -37.221,-31.341 -39.41,-31.341 -38.905,-30.836 -36.784,-30.836 -36.784,-30.876 -36.195,-31.466 -36.784,-32.055 -36.784,-33.416 -35.856,-34.344 VAUX-j.1@-34.044,-34.344 ; -48.548,8.291 -46.553,8.291 -46.32,8.523 -46.144,8.523 -45.911,8.291 -44.599,8.291 -44.057,8.832 -44.057,8.144 -44.153,8.24 -48.497,8.24 -48.548,8.291 ; -48.466,-17.828 -48.466,-16.433 -48.124,-16.091 -47.927,-16.091 -47.678,-15.842 ; -48.466,-17.828 -48.466,-18.167 -48.124,-18.509 ; -48.466,-17.828 -48.558,-17.92 -50.476,-17.92 -50.476,-13.795 -50.568,-13.703 -50.476,-13.611 -48.284,-13.611 ; -48.424,-39.614 -49.536,-39.614 -48.27,-38.348 ; -48.424,-39.614 -48.27,-39.46 -48.27,-38.348 ; -48.327,26.822 -48.07,26.566 -46.336,26.566 ; -48.327,26.822 -48.327,26.063 -48.248,25.984 -46.918,25.984 ; -48.327,26.822 -48.412,26.908 -48.412,28.642 -48.07,28.984 ; -48.27,-38.348 -48.27,-37.965 -48.186,-37.88 ; -48.27,-38.348 -48.186,-38.263 -48.186,-37.88 ; -48.186,-37.88 -48.186,-35.698 ; -48.124,-18.509 -46.39,-18.509 -46.233,-18.352 ; -48.07,28.984 -46.336,28.984 ; -48.07,28.984 -48.724,28.984 -48.981,28.727 -48.813,28.559 -48.813,25.407 -47.495,25.407 ; -47.678,-15.842 -47.678,-6.919 -47.027,-6.919 ; -47.678,-15.842 -47.678,-16.06 -47.647,-16.091 -46.754,-16.091 -46.754,-15.727 ; -47.678,-15.842 -47.398,-15.562 -47.398,-15.083 ; -47.584,-25.834 -47.897,-25.834 -48.05,-25.987 -48.05,-30.053 -47.821,-30.282 -47.584,-30.282 -47.584,-25.834 ; -47.584,-25.834 -47.584,-25.736 -47.828,-25.492 -47.828,-23.758 -47.486,-23.416 -45.752,-23.416 -45.537,-23.631 -45.415,-23.753 -45.415,-23.028 -45.415,-6.783 ; -47.495,25.407 -43.172,25.407 ; -47.495,25.407 -46.918,25.984 ; -47.398,-15.083 -47.536,-14.945 -47.536,-7.428 -47.027,-6.919 ; -47.398,-15.083 -46.754,-15.727 ; -47.398,-15.083 -47.398,-8.111 -46.599,-7.312 -46.599,-7.351 -46.805,-7.557 -46.754,-7.608 -46.754,-15.727 ; -47.027,-6.919 -46.321,-6.919 -46.193,-6.791 -46.048,-6.936 -46.048,-16.433 ; -47.027,-6.919 -46.893,-6.785 -45.417,-6.785 -45.415,-6.783 ; -46.918,25.984 -46.336,26.566 ; -46.918,25.984 -46.764,25.984 -46.635,26.113 -44.623,26.113 -44.494,26.242 ; -46.754,-15.727 -46.048,-16.433 ; -46.336,26.566 -46.27,26.632 -46.204,26.566 ; -46.336,26.566 -46.204,26.566 ; -46.336,28.984 -46.27,28.918 -46.204,28.984 ; -46.336,28.984 -46.204,28.984 ; -46.233,-18.352 -46.116,-18.352 -46.116,-18.235 ; -46.233,-18.352 -46.116,-18.235 ; -46.204,26.566 -45.202,26.566 -44.494,27.274 ; -46.204,28.984 -45.202,28.984 -45.01,28.792 ; -46.116,-18.235 -46.048,-18.167 -46.048,-16.433 ; -45.01,28.792 -44.626,28.408 ; -45.01,28.792 -42.087,28.792 -42.015,28.864 -42.015,28.886 ; -44.988,44.013 -44.717,43.742 ; -44.988,44.013 -42.908,44.013 -42.512,43.617 ; -44.929,37.442 -45.026,37.442 -44.974,37.494 -44.878,37.494 ; -44.929,37.442 -45.207,37.165 -45.59,37.165 -45.721,37.033 -43.672,37.033 ; -44.929,37.442 -44.878,37.494 ; -44.878,37.494 -44.806,37.565 ; -44.806,37.565 -44.337,37.565 -44.109,37.793 -44.109,38.263 ; -44.806,37.565 -44.109,38.263 ; -44.717,43.742 -43.461,42.486 -43.461,41.9 -43.992,42.431 -43.992,42.528 -44.878,43.413 -44.974,43.413 -45.303,43.742 -44.717,43.742 ; -44.717,43.742 -43.935,43.742 -43.392,43.199 -43.392,43.124 ; -44.626,28.408 -44.494,28.276 -44.494,27.274 ; -44.626,28.408 -41.944,28.408 -41.944,26.173 -41.696,25.925 -42.214,25.407 ; -44.494,26.242 -43.987,26.749 ; -44.494,26.242 -44.494,27.274 ; -44.109,38.263 -43.992,38.379 -43.992,38.476 -43.653,38.815 ; -44.057,17.88 -44.057,23.563 -42.214,25.407 ; -43.987,26.749 -43.434,27.302 -43.01,27.302 -42.939,27.231 -42.939,26.631 -42.998,26.69 -43.987,26.69 -43.987,26.749 ; -43.672,37.033 -42.906,37.033 -42.54,36.667 ; -43.672,37.033 -43.653,37.052 -43.653,38.815 ; -43.653,38.815 -43.653,38.909 -43.461,39.102 -43.461,39.337 -43.392,39.406 ; -43.653,38.815 -43.392,39.076 -43.392,39.406 ; -43.392,39.406 -43.325,39.473 -42.272,39.473 -42.512,39.713 -42.512,40.284 ; -43.392,39.406 -43.392,39.877 -43.226,40.043 -43.226,43.29 -43.392,43.124 ; -43.172,25.407 -42.214,25.407 ; -42.773,-18.222 -42.773,-18.369 -42.547,-18.595 -43.354,-18.595 -43.413,-18.536 -43.413,-27.283 -43.393,-27.303 -37.263,-27.303 -37.234,-27.274 -37.234,-27.119 -37.234,-26.664 -37.293,-26.605 -37.748,-26.605 -42.714,-26.605 -42.763,-26.654 -42.832,-26.585 -42.832,-19.353 -40.913,-19.353 -40.392,-19.874 -40.392,-22.237 -40.392,-22.698 -40.668,-22.974 -41.129,-22.974 -41.484,-22.974 ; -42.773,-18.222 -42.055,-18.94 -40.434,-18.94 -39.913,-19.461 -39.913,-21.759 -39.913,-23.418 ; -42.773,-18.222 -42.773,-18.202 ; -42.773,-18.202 -42.773,-16.224 -42.439,-15.89 -42.843,-15.486 -43.009,-15.486 -43.177,-15.654 -43.344,-15.654 -43.344,-16.283 -43.304,-16.323 -43.304,-18.015 -42.96,-18.015 -42.773,-18.202 ; -42.54,36.667 -39.78,36.667 -40.697,35.75 -40.697,35.729 -40.849,35.729 -41.249,36.129 -40.935,36.129 -40.892,36.172 -42.045,36.172 ; -42.54,36.667 -42.045,36.172 ; -42.512,40.284 -41.584,39.356 -39.772,39.356 -39.401,39.727 -38.897,39.727 ; -42.512,40.284 -42.512,41.604 ; -42.512,41.604 -41.902,42.214 -42.512,42.824 ; -42.512,41.604 -42.512,42.824 ; -42.512,42.824 -42.512,43.617 ; -42.512,43.617 -42.512,44.136 -41.584,45.064 -41.129,45.064 -41.067,45.126 -41.08,45.139 ; -42.178,15.301 -41.906,15.029 ; -42.178,15.301 -42.178,16.409 -41.906,16.137 -41.906,15.029 ; -42.178,15.301 -42.178,14.302 -41.441,13.565 -42.091,13.565 -42.178,13.652 -42.178,-13.459 -40.132,-15.505 -40.132,-15.785 -39.573,-16.344 -39.573,-18.598 ; -42.045,36.172 -40.735,34.862 -38.831,36.766 ; -42.042,-24.528 -42.042,-25.442 -41.7,-25.784 ; -42.042,-24.528 -42.042,-23.942 ; -42.042,-24.528 -42.399,-24.171 -42.399,-25.984 -42.419,-26.004 -41.48,-26.004 ; -42.042,-23.942 -42.498,-23.486 -42.042,-23.486 -41.922,-23.366 -41.7,-23.366 ; -42.042,-23.942 -42.042,-23.708 -41.7,-23.366 ; -42.015,28.886 -42.309,28.886 -42.557,29.134 -42.557,33.036 -42.884,33.363 -42.485,33.363 -42.015,32.893 -42.015,28.886 ; -41.906,15.029 -40.712,13.835 ; -41.799,19.921 -36.605,19.921 -35.982,20.544 ; -41.799,19.921 -41.176,20.544 ; -41.799,19.921 -42.635,19.085 -42.635,22.974 -40.985,24.624 -39.675,23.314 -34.194,23.314 -33.703,22.823 -34.223,22.303 -34.223,21.718 ; -41.7,-25.784 -41.48,-26.004 ; -41.7,-25.784 -41.52,-25.784 -39.966,-25.784 -39.644,-25.462 -39.574,-25.462 -39.178,-25.859 -39.051,-25.986 -38.367,-25.986 -36.763,-25.986 -36.763,-27.063 -36.109,-27.717 -36.012,-27.814 -36.536,-27.814 -43.694,-27.814 -43.993,-27.515 -43.993,-15.587 -43.048,-14.643 -43.048,-14.6 -41.554,-16.095 -41.554,-16.116 -41.755,-16.116 -42.097,-16.458 -42.097,-17.925 -42.1,-17.928 -42.097,-17.931 -42.097,-18.192 -41.755,-18.534 -40.096,-18.534 -39.806,-18.824 -39.573,-19.057 ; -41.7,-23.366 -41.484,-23.15 -41.484,-22.974 ; -41.7,-23.366 -41.696,-23.366 ; -41.696,-23.366 -41.657,-23.327 -41.482,-23.327 -40.557,-23.327 -40.518,-23.366 ; -41.696,-23.366 -41.52,-23.366 -40.518,-23.366 ; -41.484,-22.974 -42.025,-22.974 -42.301,-23.25 -42.301,-23.269 -42.379,-23.191 -42.379,-20.022 -42.33,-19.973 -41.012,-19.973 -41.012,-22.285 -40.854,-22.443 -40.893,-22.482 -41.484,-22.482 ; -41.484,-22.974 -41.484,-22.482 ; -41.484,-22.482 -41.76,-22.482 -41.917,-22.325 -41.917,-20.534 -41.573,-20.534 -41.484,-20.445 -41.484,-22.482 ; -41.48,-26.004 -39.458,-26.004 -39.3,-26.162 -41.322,-26.162 -41.48,-26.004 ; -41.176,20.544 -35.982,20.544 ; -41.176,20.544 -41.176,21.051 ; -41.176,21.051 v1@-41.176,21.75 ; -41.176,21.051 -41.125,21.102 -34.816,21.102 -34.334,20.62 -34.334,21.308 -34.223,21.197 ; v1@-41.176,21.75 POSRT-B.1@-35.429,21.75 -34.255,21.75 -34.223,21.718 ; -41.08,45.139 -39.846,45.139 -38.844,44.136 -38.844,42.802 -39.447,42.199 -38.899,41.651 -33.414,41.651 -30.044,45.021 -29.551,45.021 -29.669,45.139 -39.804,45.139 -38.428,43.763 -38.428,42.6 -38.765,42.263 -37.375,42.263 -37.344,42.294 -33.937,42.294 -33.779,42.136 -32.02,43.895 ; v1(-40.745,8.609) -40.745,9.923 v1(-40.712,9.956) -40.712,13.499 ; -40.712,13.499 -40.375,13.499 ; -40.712,13.499 -40.712,13.835 ; -40.712,13.499 -41.649,13.499 -41.71,13.438 -41.71,-2.1 -41.71,-12.99 -39.527,-15.173 ; -40.712,13.835 -40.375,13.499 ; -40.69,18.369 -40.659,18.369 ; -40.69,18.369 -41.339,18.369 -41.209,18.499 -37.512,18.499 ; -40.659,18.369 -37.382,18.369 ; -40.659,18.369 -40.444,18.154 -37.616,18.154 -37.534,18.072 ; -40.518,-23.366 -39.966,-23.366 -39.913,-23.418 ; -40.375,13.499 -40.291,13.414 -37.148,13.414 -36.778,13.044 ; -39.913,-23.418 -39.624,-23.708 -39.624,-23.971 -39.573,-24.022 ; -39.573,-24.022 -39.573,-19.057 ; -39.573,-24.022 -39.573,-24.039 -39.556,-24.039 ; -39.573,-24.022 -39.556,-24.039 ; -39.573,-19.057 -39.573,-18.598 ; -39.573,-19.057 -39.556,-19.074 ; -39.573,-18.598 -39.556,-18.615 -39.556,-19.074 ; -39.556,-24.039 -39.556,-19.074 ; -39.556,-24.039 -38.986,-24.039 -38.461,-24.564 -36.778,-24.564 -36.778,-17.183 -36.778,-12.519 ; -39.556,-19.074 -39.295,-19.335 -39.295,-22.505 -39.121,-22.679 ; -39.527,-15.173 -39.214,-15.485 ; -39.527,-15.173 -39.527,-14.3 ; -39.527,-15.173 -39.527,-15.524 -39.738,-15.735 -39.464,-15.735 -39.214,-15.485 ; -39.527,-14.3 -38.778,-15.049 ; -39.527,-14.3 -41.193,-12.634 -41.193,-5.78 -41.172,-5.759 -37.333,-5.759 -37.333,-11.559 ; -39.527,-14.3 -39.527,-13.372 ; -39.527,-13.372 -40.56,-12.339 -40.497,-12.276 -40.497,-6.391 -38.008,-6.391 -38.029,-6.412 -38.029,-10.863 ; -39.527,-13.372 -38.514,-14.385 -38.514,-7.13 -38.62,-7.024 -39.991,-7.024 -40.012,-7.003 -40.012,-12.149 -39.527,-12.634 ; -39.527,-13.372 -39.527,-12.634 ; -39.527,-12.634 -39.126,-13.035 -38.978,-13.035 -39.021,-12.992 -39.021,-7.53 -39.506,-7.53 -39.506,-12.002 -39.527,-12.023 -39.527,-12.634 ; -39.214,-15.485 -38.778,-15.049 ; -39.214,-15.485 -39.203,-15.497 -39.203,-18.868 -39.121,-18.95 -39.121,-22.679 ; C3.2@-39.197,27.775 -38.575,28.397 -38.575,32.546 -38.215,32.906 -38.215,34.477 -38.302,34.565 ; -39.121,-22.679 -38.346,-23.454 -38.156,-23.454 -38.325,-23.285 -38.325,-23.074 ; -39.121,-22.679 -39.121,-23.389 -38.916,-23.594 -38.564,-23.594 -38.156,-24.002 -37.354,-24.002 -37.333,-24.023 -37.333,-11.559 ; -39.021,33.542 -39.021,33.846 -38.302,34.565 ; -39.021,33.542 -39.325,33.542 -39.77,33.097 -39.77,28.886 -39.526,28.642 -39.526,28.34 -39.41,28.34 -39.021,28.729 -39.021,33.542 ; -38.897,39.727 -32.43,39.727 -31.803,40.354 ; -38.897,39.727 -38.899,39.729 -38.899,40.229 -32.824,40.229 -29.606,43.447 -29.606,40.528 -29.264,40.186 -26.28,40.186 -25.938,40.528 -25.938,43.289 -25.628,43.599 19.554,43.599 19.905,43.248 ; -38.897,39.727 -38.878,39.708 -38.878,39.681 -38.653,39.456 -31.017,39.456 -30.035,40.438 -30.147,40.55 -30.147,40.859 ; -38.831,36.766 -38.478,37.119 -31.263,37.119 -30.186,36.042 -30.186,35.036 -29.942,34.792 ; -38.778,-15.049 -38.746,-15.081 -38.746,-22.863 -38.535,-23.074 -38.325,-23.074 ; -38.778,-15.049 -38.388,-14.659 -38.325,-14.722 -38.325,-23.074 ; -38.481,17.599 -37.634,17.599 ; -38.481,17.599 -39.523,17.599 -39.551,17.571 -39.541,17.561 -39.541,16.434 -39.532,16.425 -39.523,16.434 -37.504,16.434 -37.287,16.651 -37.287,16.699 -36.763,17.223 ; -38.481,17.599 -38.461,17.619 -37.634,17.619 ; -38.481,17.599 -39.025,17.055 -38.968,16.998 -37.784,16.998 -37.634,17.148 ; -38.325,-23.074 -38.283,-23.074 -37.945,-23.412 -37.945,-15.334 -38.029,-15.25 -38.029,-10.863 ; -38.302,34.565 -37.678,35.189 -32.116,35.189 -32.116,35.036 -32.36,34.792 -32.36,33.058 -32.018,32.716 ; -38.029,-10.863 -37.333,-11.559 ; -37.634,17.148 -37.634,17.599 ; -37.634,17.148 -37.634,16.885 -37.146,16.885 -36.483,17.547 ; -37.634,17.148 -37.343,17.439 -37.343,17.534 -37.408,17.599 -37.634,17.599 ; -37.634,17.599 -37.634,17.619 ; -37.634,17.619 -36.632,17.619 ; -37.634,17.619 -37.634,17.973 -37.534,18.072 ; -37.534,18.072 -37.31,18.297 ; -37.512,18.499 -37.369,18.499 ; -37.512,18.499 -37.382,18.369 ; -37.382,18.369 -37.31,18.297 ; -37.382,18.369 -37.239,18.369 ; -37.369,18.499 -37.239,18.369 ; -37.369,18.499 -37.108,18.499 ; -37.333,-11.559 -36.778,-12.114 ; -37.31,18.297 -36.651,17.638 -36.632,17.619 ; -37.31,18.297 -37.238,18.368 -37.014,18.144 -36.948,18.144 -36.948,18.192 -36.771,18.369 ; -37.239,18.369 -37.238,18.369 ; -37.238,18.369 -36.771,18.369 ; -37.238,18.369 -37.108,18.499 ; -37.108,18.499 -37.005,18.499 ; -37.005,18.499 -36.605,18.499 -36.477,18.371 ; -37.005,18.499 -36.877,18.371 -36.769,18.371 ; -36.932,43.546 -33.826,43.546 -34.159,43.213 -34.159,43.182 -34.27,43.071 -37.407,43.071 -36.932,43.546 ; -36.932,43.546 -37.249,43.546 -37.471,43.324 -37.709,43.562 -37.709,44.085 -37.677,44.053 -32.686,44.053 -32.844,43.895 ; -36.932,43.546 -36.583,43.895 -32.844,43.895 ; -36.784,33.361 -36.784,34.454 ; -36.784,33.361 -36.784,33.108 -36.442,32.766 ; -36.784,33.361 -36.93,33.507 -36.943,33.494 -36.943,32.902 -36.807,32.766 -36.442,32.766 ; -36.784,34.454 -36.966,34.636 -37.42,34.636 -36.872,35.184 -36.442,35.184 ; -36.784,34.454 -36.784,34.842 -36.442,35.184 ; -36.778,-12.519 -36.373,-12.519 ; -36.778,-12.519 -36.778,-12.114 ; -36.778,-12.114 -36.373,-12.519 ; -36.778,-12.114 -36.778,0.16 ; -36.778,0.16 -36.046,0.16 ; -36.778,0.16 -36.778,13.044 ; -36.778,13.044 -36.353,12.619 -36.287,12.619 -36.763,12.143 -36.763,11.037 -36.234,10.508 -36.046,10.32 -36.234,10.132 -36.763,9.603 -36.763,8.497 -36.535,8.269 -36.046,7.78 -36.535,7.291 -36.763,7.063 -36.763,5.931 -36.535,5.703 -36.059,5.227 -36.535,4.751 -36.763,4.523 -36.763,3.417 -36.535,3.189 -36.046,2.7 -36.535,2.211 -36.763,1.983 -36.763,0.877 -36.046,0.16 ; -36.771,18.369 -36.713,18.369 ; -36.771,18.369 -36.769,18.371 ; -36.769,18.371 -36.715,18.371 ; -36.769,18.371 -36.742,18.398 -36.715,18.371 ; -36.763,16.218 -36.763,17.223 ; -36.763,17.223 -36.438,17.547 -36.483,17.547 ; -36.715,18.371 -36.477,18.371 ; -36.715,18.371 -36.713,18.369 ; -36.713,18.369 -36.306,17.962 -36.212,17.962 ; -36.713,18.369 -36.479,18.369 -36.477,18.371 ; -36.632,17.619 -36.561,17.547 -36.483,17.547 ; -36.632,17.619 -36.412,17.619 ; -36.551,-37.906 -34.227,-37.906 ; -36.551,-37.906 -35.909,-37.264 ; -36.551,-37.906 -38.259,-39.614 18.715,-39.614 29.187,-39.614 37.387,-39.614 v1@37.387,-38.783 ; -36.483,17.547 -36.412,17.619 ; -36.477,18.371 -36.244,18.138 -36.244,17.994 -36.212,17.962 ; -36.442,32.766 -34.708,32.766 -34.639,32.835 ; -36.412,17.619 -36.393,17.638 -36.14,17.891 ; -36.412,17.619 -36.367,17.619 -36.348,17.638 -36.14,17.846 -36.14,17.891 ; -36.373,-12.519 -36.067,-12.519 -36.048,-12.537 ; -36.373,-12.519 -36.355,-12.537 -36.048,-12.537 ; -36.212,17.962 -36.068,17.962 -36.14,17.891 ; -35.982,20.544 -34.876,20.544 -34.159,19.827 -33.506,20.48 -33.597,20.571 -34.223,21.197 ; -35.909,-37.264 -35.576,-37.264 -35.458,-37.382 -34.751,-37.382 ; -35.909,-37.264 -35.916,-37.264 -35.916,-36.412 -35.877,-36.373 -35.17,-36.373 -35.17,-36.525 ; -35.909,-37.264 -35.17,-36.525 ; -35.17,-36.525 -35.17,-37.002 -35.144,-37.028 -35.105,-37.028 -34.751,-37.382 ; -35.17,-36.525 -34.95,-36.305 -34.629,-35.984 -25.49,-35.984 -25.348,-36.126 -25.063,-36.126 -24.707,-35.77 ; -34.751,-37.382 -34.227,-37.906 ; -34.751,-37.382 -34.491,-37.382 -34.07,-37.382 -33.69,-37.762 -24.498,-37.762 -23.607,-36.871 ; -34.639,32.835 -34.366,33.108 -34.366,34.842 -34.052,34.528 -32.971,34.528 -32.891,34.448 -32.891,33.332 -32.979,33.245 ; -34.639,32.835 -33.516,32.835 -33.397,32.716 -32.45,32.716 ; -34.227,-37.906 -33.967,-37.906 -24.274,-37.906 -23.004,-37.906 -22.882,-38.028 -22.695,-38.215 -21.644,-38.215 ; -34.223,21.197 -34.223,21.718 ; VAUX-j.1@-34.044,-34.344 -33.186,-33.486 -27.916,-33.486 -27.31,-34.092 ; VAUX-j.1@-34.044,-34.344 -33.847,-34.344 -33.68,-34.177 -33.065,-34.177 -33.674,-34.786 -26.616,-34.786 ; -33.066,24.198 -32.219,23.351 ; -33.066,24.198 -32.853,24.411 -32.565,24.411 -32.508,24.354 -31.971,24.354 -31.971,23.135 -31.555,22.719 -31.555,22.303 ; -32.979,33.245 -32.992,33.231 -33.703,33.231 -33.993,33.521 -33.993,33.87 -33.569,33.87 -33.462,33.977 -33.227,33.742 -33.227,33.493 -32.979,33.245 ; -32.979,33.245 -32.45,32.716 ; -32.844,43.895 -32.02,43.895 ; -32.844,43.895 -33.985,42.754 -37.962,42.754 -37.962,43.768 -38.643,44.449 -38.643,44.64 -38.627,44.624 -31.291,44.624 -32.02,43.895 ; -32.45,32.716 -32.018,32.716 ; -32.219,23.351 -31.916,23.047 -31.916,22.663 ; -32.219,23.351 -32.219,22.967 -31.916,22.663 ; -32.217,-20.216 -32.217,-20.104 -31.723,-19.611 -31.723,-19.722 -32.217,-20.216 ; -32.217,-20.216 -31.555,-20.877 ; -32.018,32.716 -31.862,32.716 -31.862,31.515 -29.611,29.264 ; -31.943,40.467 -32.056,40.354 -31.803,40.354 ; -31.943,40.467 -32.14,40.663 -30.737,42.066 -30.147,42.066 -30.147,42.01 ; -31.943,40.467 -31.859,40.382 -31.775,40.382 ; -31.943,40.467 -31.158,41.252 -30.905,41.252 ; -31.916,22.663 -31.555,22.303 ; -31.803,40.354 -31.775,40.382 ; -31.803,40.354 -30.652,40.354 -30.147,40.859 ; -31.775,40.382 -30.905,41.252 ; -31.775,40.382 -30.961,40.382 -30.961,40.831 -30.54,41.252 -30.905,41.252 ; -31.664,21.088 -31.664,20.845 -30.418,20.845 -30.188,20.615 -29.881,20.922 -29.785,20.922 -29.727,20.864 -29.344,20.864 -29.344,20.825 -29.823,20.346 -29.785,20.308 -28.424,20.308 -28.424,20.519 -28.807,20.902 -27.791,20.902 -27.887,20.806 -27.887,19.752 -30.111,19.752 -30.641,20.282 -31.569,20.282 -30.43,19.143 -27.399,19.143 -27.399,20.857 -27.057,21.199 -25.073,21.199 ; -31.664,21.088 -31.555,21.197 -31.555,21.458 ; -31.615,-23.357 -32.077,-22.895 -32.077,-22.505 -31.615,-22.043 ; -31.615,-23.357 -31.555,-23.417 ; -31.615,-23.357 -31.615,-22.043 ; -31.615,-22.043 -31.555,-21.983 -31.555,-20.877 ; -31.555,-23.417 -31.555,-24.523 -31.596,-24.564 -30.408,-24.564 ; -31.555,-23.417 -30.408,-24.564 ; -31.555,-20.877 -31.555,-19.78 -30.661,-20.674 -23.026,-20.674 ; -31.555,21.458 -31.44,21.343 -29.958,21.343 -29.881,21.42 -29.958,21.497 -29.958,22.091 -31.402,22.091 -31.555,21.938 ; -31.555,21.458 -31.555,21.938 ; -31.555,21.938 -31.555,22.303 ; -30.905,41.252 -30.147,42.01 ; -30.408,-24.564 -22.468,-24.564 -22.359,-24.455 -22.359,-23.405 -22.856,-22.908 -22.856,-21.984 ; -30.351,29.264 -31.909,30.822 -31.909,29.427 -31.64,29.158 -31.608,29.19 -31.608,30.219 -30.653,29.264 -30.351,29.264 ; -30.351,29.264 -29.611,29.264 ; -30.147,40.859 -30.147,42.01 ; -30.147,40.859 -29.67,41.336 -29.67,42.459 -29.698,42.459 -30.147,42.01 ; -29.942,34.792 -29.942,33.058 -30.284,32.716 -30.44,32.716 -30.44,32.105 -29.021,30.686 -28.42,30.686 -28.39,30.716 -28.39,32.448 ; -29.942,34.792 -29.942,35.442 -29.709,35.675 ; -29.942,34.792 -29.694,34.544 -28.518,34.544 -28.518,36.532 -28.41,36.64 -28.498,36.728 -30.043,36.728 -29.709,36.394 -29.709,35.675 ; -29.709,35.675 -29.177,36.207 -29.039,36.069 -28.961,36.069 -28.961,35.282 -29.158,35.085 -29.463,35.085 -29.709,35.331 -29.709,35.675 ; -29.611,29.264 -29.103,28.756 25.906,28.756 ; -29.611,29.264 -28.835,29.264 ; -28.835,29.264 -28.835,28.873 -28.867,28.841 25.821,28.841 ; -28.835,29.264 25.398,29.264 25.821,28.841 ; -28.39,32.448 -28.39,34.081 -29.266,33.205 -29.266,33.039 -29.817,32.488 -29.217,31.888 -29.217,31.523 -28.922,31.228 -28.902,31.228 -28.902,32.842 -28.843,32.901 -28.39,32.448 ; -28.39,32.448 -26.628,30.686 25.266,30.686 25.266,31.003 24.873,31.396 ; -27.471,-30.828 -26.979,-30.336 ; -27.471,-30.828 -27.796,-31.153 -31.957,-31.153 -32.203,-30.907 -32.203,-30.493 -32.135,-30.425 -32.066,-30.494 -27.54,-30.494 -27.471,-30.563 -27.471,-30.828 ; -27.471,-30.828 -27.471,-31.576 -32.764,-31.576 -32.941,-31.399 -32.676,-31.134 -32.676,-29.766 -32.587,-29.855 -26.979,-29.855 -26.979,-30.336 ; -27.31,-34.092 -27.198,-34.203 ; -27.31,-34.092 -32.645,-34.092 -32.534,-34.203 -27.198,-34.203 ; -27.198,-34.203 -26.616,-34.786 ; -26.979,-30.336 -26.979,-31.38 v1@-26.354,-32.005 ; -26.616,-34.786 -25.691,-34.786 ; v1@-26.475,24.088 -24.855,24.088 ; v1@-26.475,24.088 -26.475,23.113 -26.475,22.5 -24.855,22.5 ; v1@-26.475,24.088 v1@-26.475,25.675 ; v1@-26.475,25.675 v1@-24.885,25.675 ; -26.354,-33.037 v1@-26.354,-32.005 ; -26.354,-33.037 -27.326,-32.064 -33.156,-32.064 -33.73,-31.49 -33.116,-30.876 -33.116,-29.564 -33.443,-29.236 -24.037,-29.236 -23.712,-29.561 -23.712,-31.838 -24.216,-32.342 -24.216,-33.172 -24.408,-33.364 -26.026,-33.364 -26.281,-33.109 ; -26.354,-33.037 -26.281,-33.109 ; v1@-26.354,-32.005 -25.828,-32.531 -25.414,-32.531 -25.395,-32.55 v1@-25.395,-30.412 ; -26.281,-33.109 v1(-24.858,-33.109) v1@-24.858,-32.99 ; v1(-26.075,11.275) -23.7,11.275 vc18.2@-23.65,11.225 ; v1(-26.075,11.275) v1(-26.075,9.8) -23.675,9.8 vc18.2@-23.65,9.825 ; v1(-26.075,11.275) -26.075,12.85 v1(-26.05,12.875) -26.025,12.85 vc6.2@-23.65,12.85 ; -25.691,-34.786 -24.468,-34.786 ; -25.691,-34.786 -25.08,-35.398 ; v1@-25.395,-30.412 -25.395,-30.219 -25.759,-29.855 -24.244,-29.855 -24.175,-29.924 -24.175,-31.33 v1@-24.858,-32.013 ; v1@-25.395,-30.412 v1(-24.858,-30.412) v1(-24.858,-31.761) v1@-24.858,-31.82 ; -25.08,-35.398 -24.707,-35.77